# Allegro board abc.brd
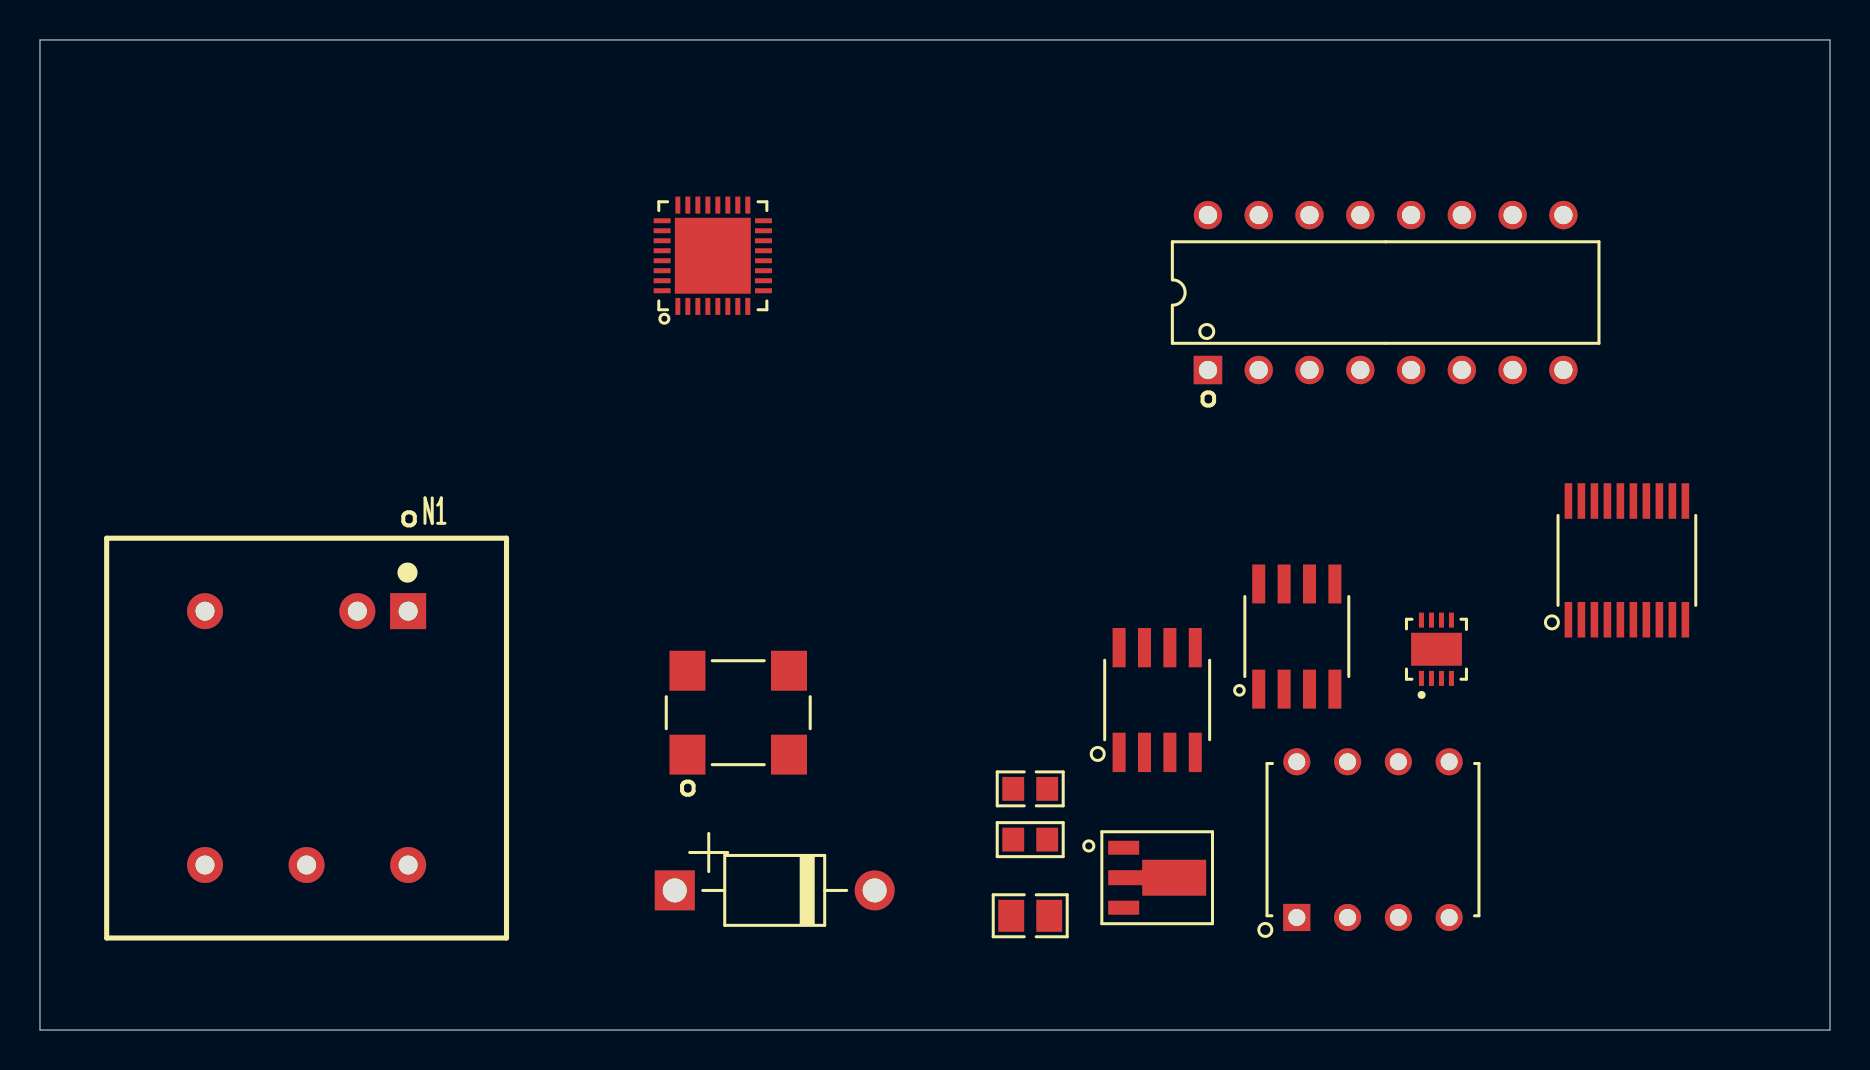
[diagram p0: board, top side]
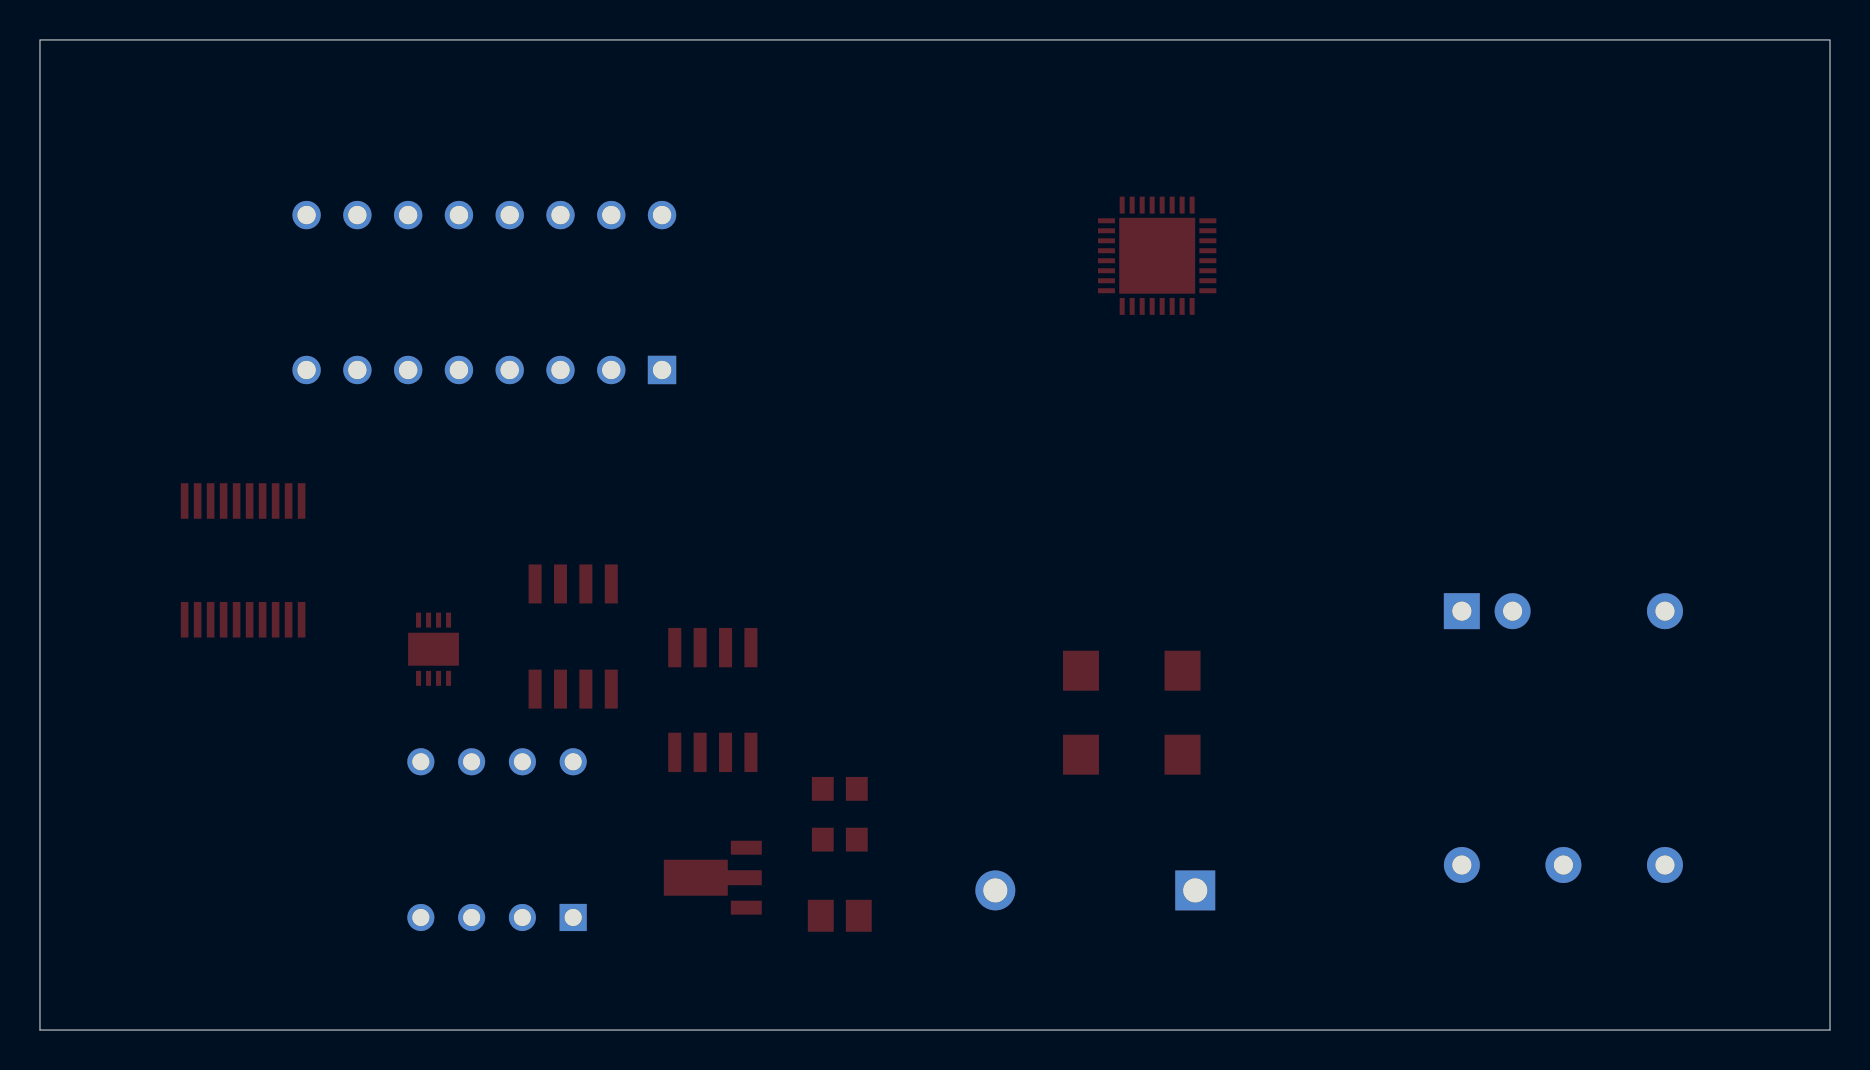
[diagram p1: board, bottom side, seen from below]

Outline 89.54 x 49.53 mm; copper layers: TOP, BOTTOM. Coordinates in mm from the lower left corner of the outline.
Outline path: 0,49.53 0,0 89.54,0 89.54,49.53 0,49.53

## Placement (name value [footprint] x y rotation side)
C1  CAPACITOR_1  [CAPC0805_0135MM_1]  49.53 5.72 0 top
C2  CAPACITOR_0  [CAPC0603_0090MM_3]  49.53 12.06 0 top
D1  AD668  [DIP16_C]  58.42 33.02 0 top
D2  DIODE  [D2-10A]  31.75 6.99 0 top
G1  TP_CRYSTAL  [OSCSC4Q0720X0520X0180MM]  34.93 15.88 0 top
L1  INDUCTOR_BEAD_2  [RESC0603_0060MM_1]  49.53 9.53 0 top
N1  HSG28D15_2  [DCDC-10V]  13.34 14.6 0 top
U1  1685fa  [SO_8_1R27P5R26SPR1R95X0R65]  62.87 19.69 0 top
U2  AD9834  [TSSOP_20_0R65P5R94SPR1R78X0R38]  79.38 23.5 0 top
U3  ADM3483E  [SOIC_8_1R27P5R24SPR1R97X0R65]  55.88 16.51 0 top
U4  BGA7024  [SOT89_3_1R5P_PR1R55X0R7]  55.88 7.62 0 top
U5  HCPL-5150  [DIP_8_2R54P7R79SPC1R358D0R85]  66.68 9.53 0 top
U6  LTC2862A  [QFN_8T_0R5P2R915SPR0R75X0R25_A]  69.85 19.05 0 top
U7  RFFC2071  [QFN_32T_0R5P5R07SPR0R85X0R25_A]  33.66 38.74 0 top

## Library data of the parts
C1 = CAPACITOR_1
C2 = CAPACITOR_0
D1 = AD668
D2 = DIODE
G1 = TP_CRYSTAL
L1 = INDUCTOR_BEAD_2
N1 = HSG28D15_2
U1 = 1685fa
U2 = AD9834
U3 = ADM3483E
U4 = BGA7024
U5 = HCPL-5150
U6 = LTC2862A
U7 = RFFC2071

## Footprints (pads in the part's own frame, mm; a bottom-side part is the same pattern mirrored in y, then rotated)
CAPC0603_0090MM_3
  rect 1.092x1.194 smd: 1(-0.85,0) 2(0.85,0)
CAPC0805_0135MM_1
  rect 1.295x1.6 smd: 1(-0.95,0) 2(0.95,0)
D2-10A
  rect 2x2 hole 1.2: 1(0,0)
  round 2 hole 1.2: 2(10,0)
DCDC-10V
  rect 1.8x1.8 hole 0.95: 1(5.08,6.35)
  round 1.8 hole 0.95: 2(2.54,6.35) 3(-5.08,6.35) 4(-5.08,-6.35) 5(0,-6.35) 6(5.08,-6.35)
DIP16_C
  rect 1.422x1.422 hole 0.914: 1(0,0)
  round 1.422 hole 0.914: 2(2.54,0) 3(5.08,0) 4(7.62,0) 5(10.16,0) 6(12.7,0) 7(15.24,0) 8(17.78,0) 9(17.78,7.75) 10(15.24,7.75) 11(12.7,7.75) 12(10.16,7.75) 13(7.62,7.75) 14(5.08,7.75) 15(2.54,7.75) 16(0,7.75)
DIP_8_2R54P7R79SPC1R358D0R85
  rect 1.358x1.358 hole 0.85: 1(-3.81,-3.895)
  round 1.358 hole 0.85: 2(-1.27,-3.895) 3(1.27,-3.895) 4(3.81,-3.895) 5(3.81,3.895) 6(1.27,3.895) 7(-1.27,3.895) 8(-3.81,3.895)
OSCSC4Q0720X0520X0180MM
  rect 1.8x2 smd: 1(-2.54,-2.1) 2(2.54,-2.1) 3(2.54,2.1) 4(-2.54,2.1)
QFN_8T_0R5P2R915SPR0R75X0R25_A
  rect 0.25x0.75 smd: 1(-0.75,-1.457) 2(-0.25,-1.457) 3(0.25,-1.457) 4(0.75,-1.457) 5(0.75,1.457) 6(0.25,1.457) 7(-0.25,1.457) 8(-0.75,1.457)
  rect 2.54x1.65 smd: A(0,0)
QFN_32T_0R5P5R07SPR0R85X0R25_A
  rect 0.25x0.85 smd: 1(-1.75,-2.535) 2(-1.25,-2.535) 3(-0.75,-2.535) 4(-0.25,-2.535) 5(0.25,-2.535) 6(0.75,-2.535) 7(1.25,-2.535) 8(1.75,-2.535) 17(1.75,2.535) 18(1.25,2.535) 19(0.75,2.535) 20(0.25,2.535) 21(-0.25,2.535) 22(-0.75,2.535) 23(-1.25,2.535) 24(-1.75,2.535)
  rect 0.85x0.25 smd: 9(2.535,-1.75) 10(2.535,-1.25) 11(2.535,-0.75) 12(2.535,-0.25) 13(2.535,0.25) 14(2.535,0.75) 15(2.535,1.25) 16(2.535,1.75) 25(-2.535,1.75) 26(-2.535,1.25) 27(-2.535,0.75) 28(-2.535,0.25) 29(-2.535,-0.25) 30(-2.535,-0.75) 31(-2.535,-1.25) 32(-2.535,-1.75)
  rect 3.8x3.8 smd: A(0,0)
RESC0603_0060MM_1
  rect 1.092x1.194 smd: 1(-0.85,0) 2(0.85,0)
SO_8_1R27P5R26SPR1R95X0R65
  rect 0.65x1.95 smd: 1(-1.905,-2.63) 2(-0.635,-2.63) 3(0.635,-2.63) 4(1.905,-2.63) 5(1.905,2.63) 6(0.635,2.63) 7(-0.635,2.63) 8(-1.905,2.63)
SOIC_8_1R27P5R24SPR1R97X0R65
  rect 0.65x1.97 smd: 1(-1.905,-2.62) 2(-0.635,-2.62) 3(0.635,-2.62) 4(1.905,-2.62) 5(1.905,2.62) 6(0.635,2.62) 7(-0.635,2.62) 8(-1.905,2.62)
SOT89_3_1R5P_PR1R55X0R7
  rect 1.55x0.7 smd: 1(-1.675,1.5) 3(-1.675,-1.5)
  custom 4.9x1.8 smd: 2(0,0)
TSSOP_20_0R65P5R94SPR1R78X0R38
  rect 0.38x1.78 smd: 1(-2.925,-2.97) 2(-2.275,-2.97) 3(-1.625,-2.97) 4(-0.975,-2.97) 5(-0.325,-2.97) 6(0.325,-2.97) 7(0.975,-2.97) 8(1.625,-2.97) 9(2.275,-2.97) 10(2.925,-2.97) 11(2.925,2.97) 12(2.275,2.97) 13(1.625,2.97) 14(0.975,2.97) 15(0.325,2.97) 16(-0.325,2.97) 17(-0.975,2.97) 18(-1.625,2.97) 19(-2.275,2.97) 20(-2.925,2.97)

## Nets
AVDD: U2.4(AVDD)
DVDD: U2.5(DVDD)
N00805: U1.1(RO) U5.4(N/C#4)
N00817: U1.2(R\E\) U5.3(CATHODE)
N00832: U1.3(DE) U5.2(ANODE)
N00847: U1.4(DI) U5.1(N/C#1)
N00854: U1.8(VDD) U2.1(FS ADJUST)
N00866: U1.7(B) U2.2(REFOUT)
N00878: U1.6(A) U2.3(COMP)
N00893: U1.5(GND) U2.6(CAP/2.5V)
N00907: U2.7(DGND) U5.8(VCC)
N00932: U2.8(MCLK) U5.7(VO#7)
N00945: U2.9(FSSELECT) U5.6(VO#6)
N00957: U2.10(PSSELECT) U5.5(VEE)
N00969: D1.11(NC1) U6.1(RO)
N00981: D1.10(NC2) U6.2(R\E\)
N01006: N1.3(GND_I) U6.3(DE)
N01031: N1.2(VIN+) U6.4(DI)
N01061: D1.5(GAIN) N1.1(INH)
N01068: D1.4(A3 IN) U6.8(VCC)
N01082: D1.6(VHIGH) U6.7(B)
N01143: D1.12(BAL) U6.6(A)
N01155: N1.5(GND_O) U6.5(GND) U6.A(EPAD)
N01198: L1.1 N1.6(VOUT+)
N01210: G1.3 N1.4(VOUT-)
N01228: D1.7(NOISE) D1.8(VLOW) D1.13(A4 IN) G1.1 L1.2
N01285: D2.1(A) G1.4
N01303: D2.2(K) G1.2 U7.9(MODE/GPO6) U7.10(REF_IN) U7.11(NC#11) U7.12(TM) U7.13(MIX1_IPN) U7.14(MIX1_IPP) U7.15(GPO1/ADD1) U7.16(GPO2/ADD2)
N01321: U2.20(IOUTB) U3.1(RO)
N01328: U2.18(AGND) U2.19(IOUT) U3.2(R\E\)
N01349: U2.17(VIN) U3.3(DE)
N01359: U2.16(SIGN BIT OUT) U3.4(DI)
N01363: C1.1 U2.15(FS YNC)
N01372: C2.1 U2.14(SCLK)
N01384: U2.13(SDATA) U3.5(GND)
N01399: U2.12(SLEEP) U3.6(A)
N01414: U2.11(RESET) U3.7(B)
N01429: U3.8(VCC) U4.3(RF_IN)
N01502: C1.2 C2.2 D1.2(+VS)
N01985: D1.9(GND SENSE +IN) U7.1(ENBL/GPO5)
N01992: D1.16(-VS) U7.2(EXT_LO) U7.3(EXT_LO_DEC) U7.4(REXT)
N02004: D1.3(+10VOUTS) U7.5(ANA_VDD1) U7.6(LFILT1)
N02011: D1.1(+10VOUTF) U7.7(LFILT2)
N02015: D1.14(-10VOUTS) D1.15(-10VOUTF) U7.8(LFILT3)
N02222: U4.1(VCC(RF)) U7.17(MIX1_OPN) U7.18(MIX1_OPP) U7.19(DIG_VDD) U7.20(NC#20) U7.21(NC#21) U7.22(ANA_VDD2) U7.23(MIX2_IPP) U7.24(MIX2_IPN) U7.A(EPAD)
N02376: U4.2(GND) U7.25(GPO3/FM) U7.26(GPO4/LD/DO) U7.27(MIX2_OPN) U7.28(MIX2_OPP) U7.29(RESETX) U7.30(ENX) U7.31(SCLK) U7.32(SDATA)
